# Altium PCB Matrix.PcbDoc
Units mm, origin at the board's own origin, x right, y up, seen from the top; angles counter-clockwise.
Board outline 164.08 x 99.19 mm, 4 copper layers (Top Layer, Internal Plane 1, Internal Plane 2, Bottom Layer); 54 components, 93 nets, 274 pads, 62 vias.
Unrouted connection lines stored in the file: 12.
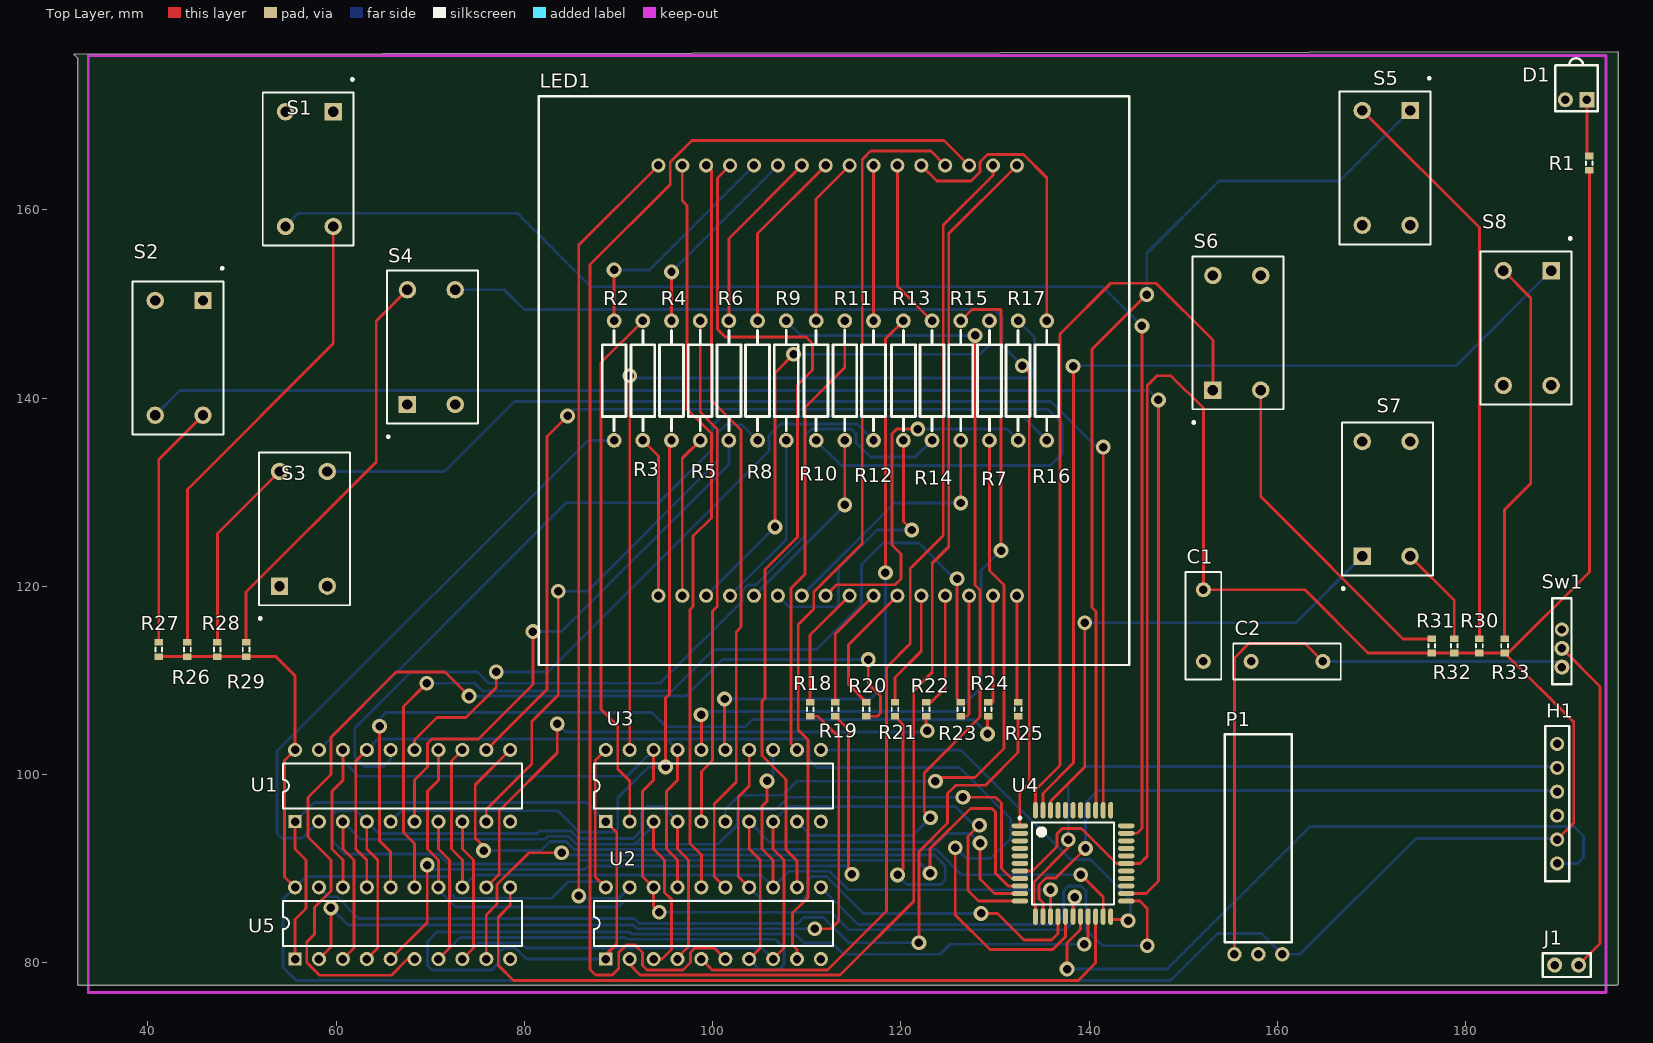
[diagram p0: Top Layer view]
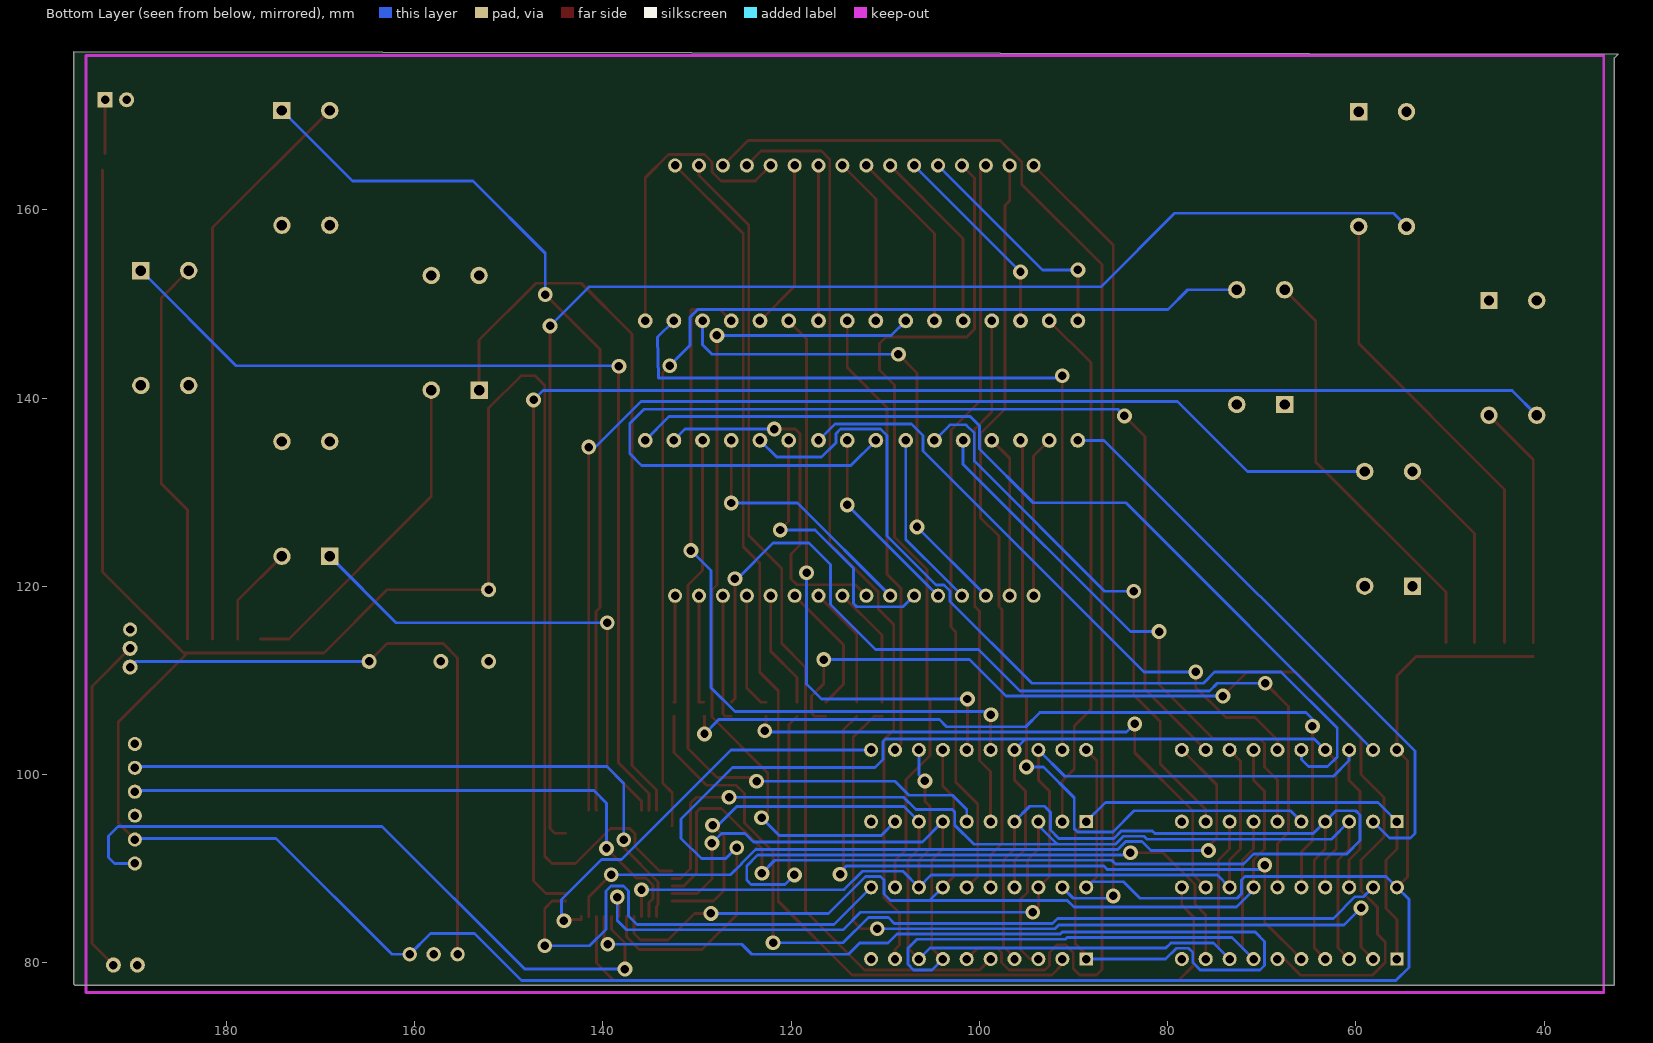
[diagram p1: Bottom Layer view, seen from below]
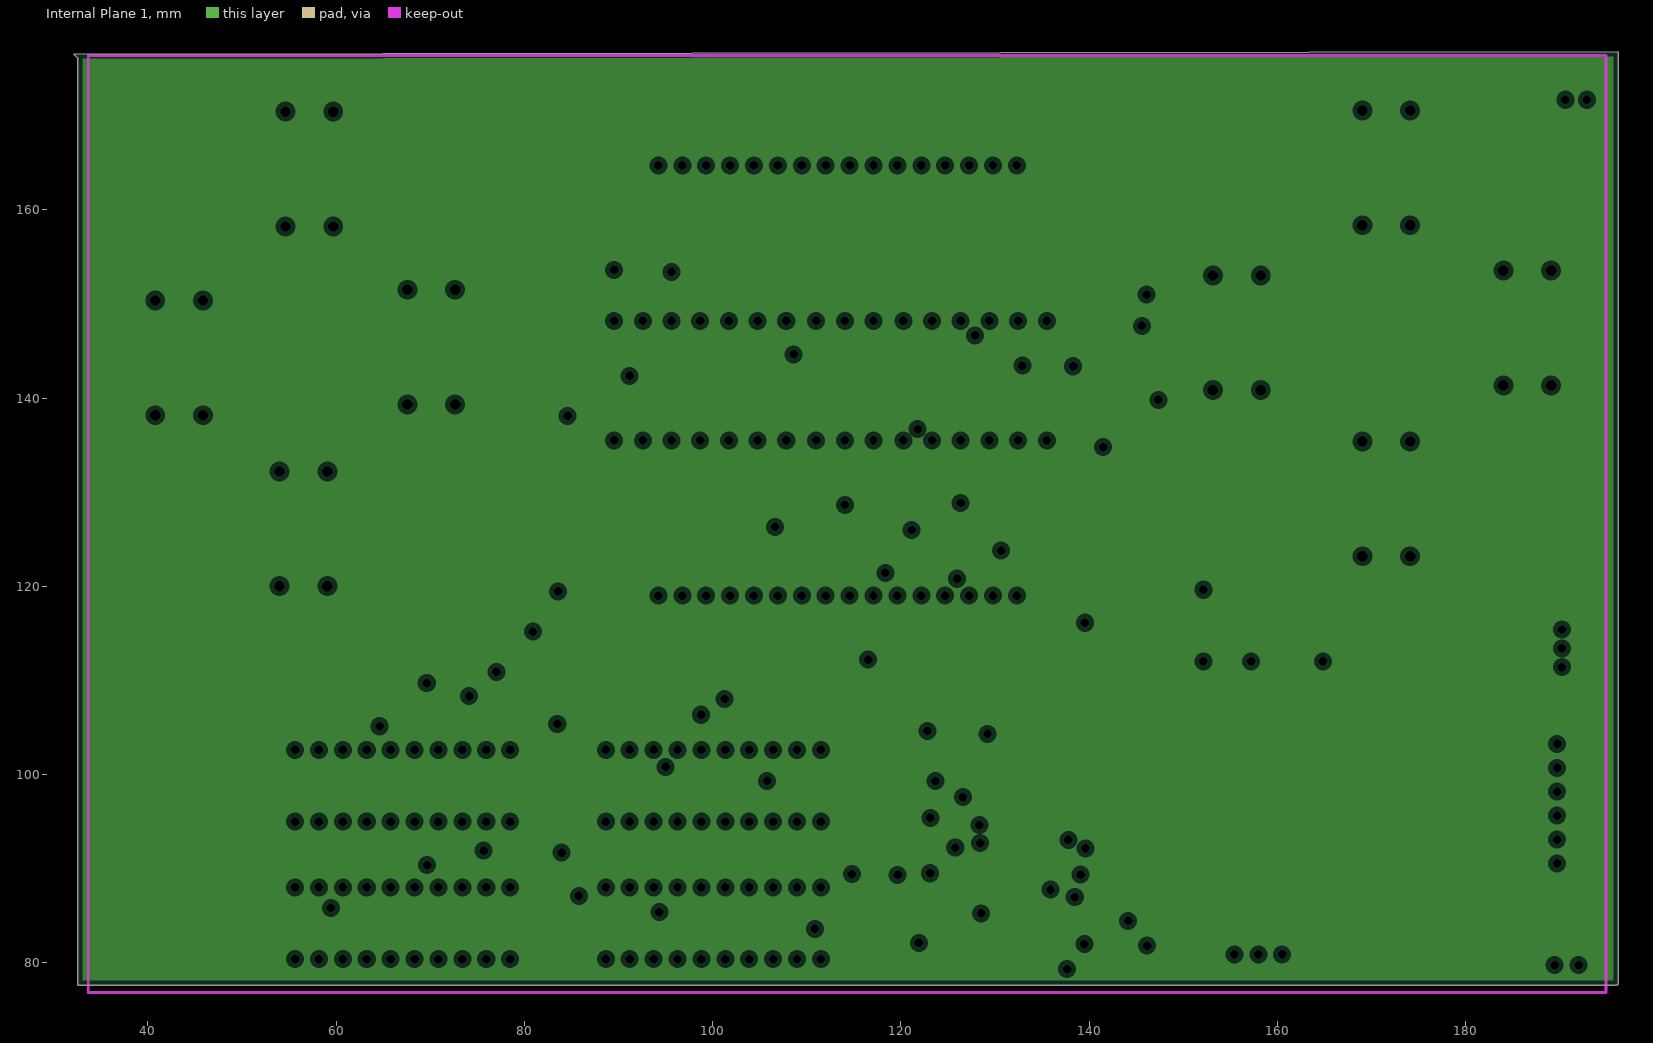
[diagram p2: Internal Plane 1, clearances drawn from the general rule]
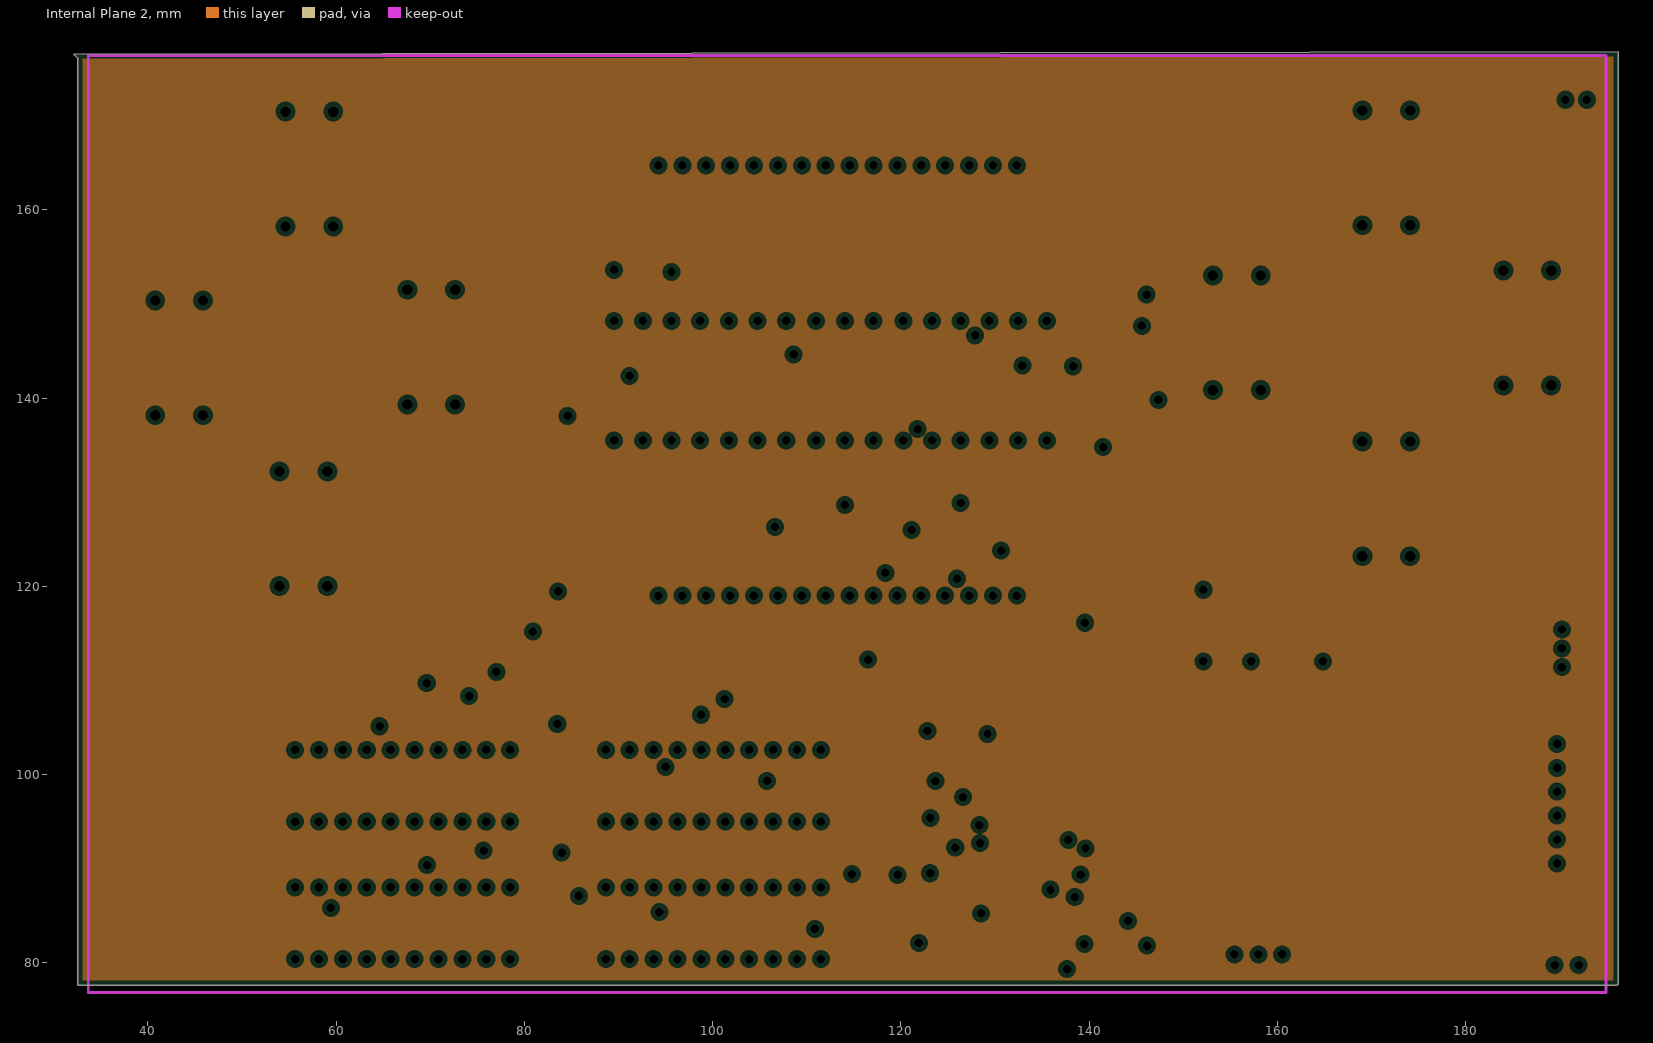
[diagram p3: Internal Plane 2, clearances drawn from the general rule]

## Layer stack, top to bottom
Top Layer: signal copper 0.0356
Dielectric: dielectric 0.32, FR-4, Dk 4.8
Internal Plane 1: plane copper 0.0356
Dielectric: dielectric 0.32, FR-4, Dk 4.8
Internal Plane 2: plane copper 0.0356
Dielectric: dielectric 0.32, FR-4, Dk 4.8
Bottom Layer: signal copper 0.0356

## Board outline
32.131,176.53 32.512,176.149 32.512,77.597 196.088,77.597 196.215,77.724 196.215,176.784

## Design rules (kind name [scope] priority, off if disabled: settings)
Clearance [All] p1: gap=0.254
PlaneClearance [All] p1: clearance=0.508
PlaneConnect [All] p1: planeconnectstyle=Relief reliefexpansion=0.508 reliefentries=4 reliefconductorwidth=0.254 reliefairgap=0.254
PolygonConnect [All] p1: connectstyle=Relief reliefconductorwidth=0.254 reliefentries=4 polygonreliefangle="90 Angle"
RoutingVias [All] p1: holewidth=0.813 width=1.575 viastyle="Through Hole" minholewidth=0.711 minwidth=1.27 maxholewidth=0.711 maxwidth=1.27
SilkscreenOverComponentPads [All] p1: minsilkscreentomaskgap=0.254
SolderMaskExpansion [All] p1: expansion=0.102
Width [All] p1: maxlimit=0.3 minlimit=0.3 preferedwidth=0.3
25 further rules are at their usual default settings.

## Components (designator, comment, footprint, x,y, rotation, side; value= is the part's Value field where it differs from the comment)
C1 "Cap" RAD-0.3 152.146,115.824 r90 top
C2 "Cap" RAD-0.3 161.036,112.014 r0 top
D1 "LED" LED-5608F 192.913,171.704 r180 top
H1 "6-pin Header" "6-pin Header" 189.738,96.901 r90 top
J1 "two-holes" two-holes 190.754,79.756 r180 top
LED1 "8x8 RGB Matrix" "8x8 RGB Matrix" 112.014,141.859 r0 top
P1 "1016-1538-5-ND" 1016-1538-5-ND 157.988,80.899 r0 top
R1 "Res25" J1-0603 193.167,164.973 r90 top
R2 "80" AXIAL0.5 89.535,148.209 r270 top
R3 "80" AXIAL0.5 92.583,148.209 r270 top
R4 "80" AXIAL0.5 95.631,148.209 r270 top
R5 "80" AXIAL0.5 98.679,148.209 r270 top
R6 "80" AXIAL0.5 101.727,148.209 r270 top
R7 "80" AXIAL0.5 129.413,135.509 r90 top
R8 "80" AXIAL0.5 104.775,148.209 r270 top
R9 "80" AXIAL0.5 107.823,148.209 r270 top
R10 "80" AXIAL0.5 110.998,148.209 r270 top
R11 "80" AXIAL0.5 114.046,148.209 r270 top
R12 "80" AXIAL0.5 117.094,148.209 r270 top
R13 "80" AXIAL0.5 120.269,148.209 r270 top
R14 "80" AXIAL0.5 123.317,148.209 r270 top
R15 "80" AXIAL0.5 126.365,148.209 r270 top
R16 "80" AXIAL0.5 135.509,148.209 r270 top
R17 "80" AXIAL0.5 132.461,148.209 r270 top
R18 "Res3" J1-0603 110.363,106.934 r90 top
R19 "Res3" J1-0603 113.03,106.934 r90 top
R20 "Res3" J1-0603 116.332,106.934 r90 top
R21 "Res3" J1-0603 119.38,106.934 r90 top
R22 "Res3" J1-0603 122.682,106.934 r90 top
R23 "Res3" J1-0603 126.365,106.934 r270 top
R24 "Res3" J1-0603 129.286,106.934 r90 top
R25 "Res3" J1-0603 132.461,106.934 r90 top
R26 "Res3" J1-0603 44.196,113.284 r270 top
R27 "Res3" J1-0603 41.148,113.284 r270 top
R28 "Res3" J1-0603 47.371,113.284 r270 top
R29 "Res3" J1-0603 50.419,113.284 r270 top
R30 "Res3" J1-0603 181.483,113.665 r270 top
R31 "Res3" J1-0603 176.403,113.665 r270 top
R32 "Res3" J1-0603 178.816,113.665 r270 top
R33 "Res3" J1-0603 184.15,113.665 r270 top
S1 "SW-DPST" DPST-4 57.15,164.338 r270 top
S2 "SW-DPST" DPST-4 43.307,144.272 r270 top
S3 "SW-DPST" DPST-4 56.515,126.111 r90 top
S4 "SW-DPST" DPST-4 70.104,145.415 r90 top
S5 "SW-DPST" DPST-4 171.577,164.465 r270 top
S6 "SW-DPST" DPST-4 155.702,146.939 r90 top
S7 "SW-DPST" DPST-4 171.577,129.286 r90 top
S8 "SW-DPST" DPST-4 186.563,147.447 r270 top
Sw1 "563-1090-ND" 563-1090-ND 190.246,113.411 r90 top
U1 "74HC373" 74HC373 55.626,94.996 r90 top
U2 "74HC373" 74HC373 88.646,80.391 r90 top
U3 "74HC373" 74HC373 88.646,94.996 r90 top
U4 "PIC18F4550-I/PT" TQFP-PT44_N 138.303,90.551 r0 top
U5 "74HC373" 74HC373 55.626,80.391 r90 top

## Footprints (in the part's own frame and the unit in brackets; to place one, negate y for a bottom-side part, rotate by r counter-clockwise, add the part's x,y. Pads: shape width x height; smd on the part's side, far side on the other; paste and mask are expansions set on the pad)
"6-pin Header" [mm]
  round 1.5 hole 0.9: 1(-6.35,0) 2(-3.81,0) 3(-1.27,0) 4(1.27,0) 5(3.81,0) 6(6.35,0)
  silkscreen extent -8.25,-1.27 8.25,1.27
"8x8 RGB Matrix" [mm]
  round 1.5 hole 0.9: 1(-17.78,-22.86) 2(-15.24,-22.86) 3(-12.7,-22.86) 4(-10.16,-22.86) 5(-7.62,-22.86) 6(-5.08,-22.86) 7(-2.54,-22.86) 8(0,-22.86) 9(2.54,-22.86) 10(5.08,-22.86) 11(7.62,-22.86) 12(10.16,-22.86) 13(12.7,-22.86) 14(15.24,-22.86) 15(17.78,-22.86) 16(20.32,-22.86) 17(20.32,22.86) 18(17.78,22.86) 19(15.24,22.86) 20(12.7,22.86) 21(10.16,22.86) 22(7.62,22.86) 23(5.08,22.86) 24(2.54,22.86) 25(0,22.86) 26(-2.54,22.86) 27(-5.08,22.86) 28(-7.62,22.86) 29(-10.16,22.86) 30(-12.7,22.86) 31(-15.24,22.86) 32(-17.78,22.86)
  silkscreen extent -30.48,-30.23 32.26,30.23
74HC373 [mm]
  rect 1.4x1.4 hole 0.9: 1(0,0)
  round 1.5 hole 0.9: 2(0,-2.54) 3(0,-5.08) 4(0,-7.62) 5(0,-10.16) 6(0,-12.7) 7(0,-15.24) 8(0,-17.78) 9(0,-20.32) 10(0,-22.86) 11(7.62,-22.86) 12(7.62,-20.32) 13(7.62,-17.78) 14(7.62,-15.24) 15(7.62,-12.7) 16(7.62,-10.16) 17(7.62,-7.62) 18(7.62,-5.08) 19(7.62,-2.54) 20(7.62,0)
  silkscreen extent 1.4,-24.13 6.19,1.27
563-1090-ND [mm]
  round 1.6 hole 0.9: 1(-2,0) 2(0,0)
  round 1.5 hole 0.9: 3(2,0)
  silkscreen extent -3.81,-1.02 5.33,1.02
1016-1538-5-ND [mil]
  round 60 hole 35.43: 0(-100,0) 1(0,0) 2(100,0)
  silkscreen extent -140,50 140,920
AXIAL0.5 [mil]
  round 62 hole 35.43: 1(0,0) 2(500,0)
  silkscreen extent 40,-50 460,50
DPST-4 [mm] "Switch; 4 Leads"
  rect 1.85x1.85 hole 1.1: 1(-6.096,2.54)
  round 1.85 hole 1.1: 2(-6.096,-2.54) 3(6.096,-2.54) 4(6.096,2.54)
  silkscreen extent -9.65,-4.95 8.13,4.7
J1-0603 [mm] "Chip Resistor, Body 1.6x0.8mm, IPC High Density"
  rect 0.7x0.9 smd: 1(-0.75,0) 2(0.75,0)
  silkscreen extent -0.2,-0.35 0.2,0.35, body extent -0.85,-0.48 0.85,0.48, height 0.9
LED-5608F [mm]
  rect 1.6x1.6 hole 0.9: A(0,0)
  round 1.6 hole 0.9: K(2.3,0)
  silkscreen extent -1.14,-4.41 3.38,1.23
RAD-0.3 [mm] "Radial Cap, Thru-Hole; 2 Leads; 0.3 in Pin Spacing"
  round 1.6 hole 0.9: 1(-3.81,0) 2(3.81,0)
  silkscreen extent -5.71,-1.91 5.71,1.91
TQFP-PT44_N [mm] "Thin QFP, 44-Leads, Body 10x10mm, Pitch 0.8mm, IPC Medium Density"
  oval 1.75x0.525 smd: 1(-5.65,4) 2(-5.65,3.2) 3(-5.65,2.4) 4(-5.65,1.6) 5(-5.65,0.8) 6(-5.65,0) 7(-5.65,-0.8) 8(-5.65,-1.6) 9(-5.65,-2.4) 10(-5.65,-3.2) 11(-5.65,-4) 23(5.65,-4) 24(5.65,-3.2) 25(5.65,-2.4) 26(5.65,-1.6) 27(5.65,-0.8) 28(5.65,0) 29(5.65,0.8) 30(5.65,1.6) 31(5.65,2.4) 32(5.65,3.2) 33(5.65,4)
  oval 0.55x1.75 smd: 12(-4,-5.65)
  oval 0.525x1.75 smd: 13(-3.2,-5.65) 14(-2.4,-5.65) 15(-1.6,-5.65) 16(-0.8,-5.65) 17(0,-5.65) 18(0.8,-5.65) 19(1.6,-5.65) 20(2.4,-5.65) 21(3.2,-5.65) 22(4,-5.65) 34(4,5.65) 35(3.2,5.65) 36(2.4,5.65) 37(1.6,5.65) 38(0.8,5.65) 39(0,5.65) 40(-0.8,5.65) 41(-1.6,5.65) 42(-2.4,5.65) 43(-3.2,5.65) 44(-4,5.65)
  silkscreen extent -5.77,-4.35 4.35,4.95, body extent -5,-5 5,5, height 1.2
two-holes [mm]
  round 1.6 hole 0.9: 1(-1.27,0) 2(1.27,0)
  silkscreen extent -2.54,-1.27 2.54,1.27

## Part data
C1 C2: "Capacitor"
D1: "Light Emitting Diode LED"
R1: library part Res3, "Resistor"
R2 R3 R4 R5 R6 R7 R8 R9 R10 R11 R12 R13 R14 R15 R16 R17: library part RES1
R18 R19 R20 R21 R22 R23 R24 R25 R26 R27 R28 R29 R30 R31 R32 R33: "Resistor"
S1 S2 S3 S4 S5 S6 S7 S8: "Double-Pole, Single-Throw Switch"
U4: "High Performance, Enhanced Flash, USB Microcontroller with nanoWatt Technology, 32K Flash, 44-Pin TQFP, Industrial Temperature Range"

## Via types
v1: diameter 1.575, hole 0.9, Top Layer to Bottom Layer, 61 vias
v2: diameter 1.575/1.575 (per signal layer), hole 0.9, Top Layer to Bottom Layer, 1 vias

## Nets (pads, with @x,y where several pads share a name; then routed paths per layer and width w, separated by ;. In a path a pad name is that pad's centre, name@x,y a point inside that pad or via, vN(x,y) a via of type N, cw(c..) or ccw(c..) an arc to the next point about the centre after c; other vN are vias at no path point)
!OE: U1.1 U2.1 U3.1 U4.19 U5.1 | length 164.4
  Top Layer w0.3: U5.1 55.626,84.579 56.794,85.747 56.794,90.907 55.626,92.075 U1.1 ; U2.1 88.646,80.852 89.814,82.021 89.814,93.828 U3.1 ; v1(139.497,81.966) 139.903,82.372 U4.19
  Bottom Layer w0.3: U1.1 57.658,97.028 86.614,97.028 U3.1 ; U2.1 80.213,80.391 79.059,81.545 77.787,81.545 77.318,81.075 77.318,80.01 76.53,79.223 70.168,79.223 69.698,79.692 69.698,82.271 70.688,83.261 91.196,83.261 91.404,83.054 108.744,83.054 109.698,82.099 112.719,82.099 113.913,80.905 124.184,80.905 125.245,81.966 v1(139.497,81.966)
BL0: R3.1 U3.2 | length 56.3
  Top Layer w0.3: U3.2 91.186,99.314 89.916,100.584 89.916,105.156 88.138,106.934 88.138,143.764 R3.1
BL1: R5.1 U3.5 | length 54.7
  Top Layer w0.3: R5.1 98.679,138.532 100.482,136.728 100.482,117.856 99.974,117.348 99.974,101.473 98.806,100.305 U3.5
BL2: R7.1 U3.6 | length 67
  Top Layer w0.3: v1(123.673,99.289) 124.079,99.695 127.889,99.695 130.962,102.768 130.962,120.142 129.413,121.691 R7.1
  Bottom Layer w0.3: U3.6 101.346,96.266 102.87,97.79 107.478,97.79 108.977,99.289 v1(123.673,99.289)
BL3: R9.1 U3.9 | length 90.5
  Top Layer w0.3: v1(123.139,95.402) 122.481,96.06 122.481,100.155 128.422,106.096 128.422,119.609 127.889,120.142 v1(127.889,146.66)
  Bottom Layer w0.3: R9.1 109.372,146.66 v1(127.889,146.66) ; U3.9 110.431,93.531 121.268,93.531 v1(123.139,95.402)
BL4: R11.1 U3.12 | length 48.2
  Top Layer w0.3: U3.12 108.32,103.262 108.32,119.801 109.804,121.285 109.804,139.014 114.046,143.256 R11.1
BL5: R13.1 U3.15 | length 62.6
  Top Layer w0.3: v1(101.27,108.026) 101.27,102.616 U3.15 ; v1(118.364,121.437) 118.364,146.304 R13.1
  Bottom Layer w0.3: v1(101.27,108.026) 116.789,108.026 118.364,109.601 v1(118.364,121.437)
BL6: R15.1 U3.16 | length 80.5
  Top Layer w0.3: v1(98.781,106.35) 98.806,106.324 U3.16 ; R15.1 127.559,149.403 130.607,149.403 130.658,149.352 v1(130.658,123.8)
  Bottom Layer w0.3: v1(98.781,106.35) 99.111,106.68 125.984,106.68 128.524,109.22 128.524,121.666 v1(130.658,123.8)
BL7: R17.1 U3.19 | length 89.5
  Top Layer w0.3: U3.19 v1(91.186,142.367)
  Bottom Layer w0.3: v1(91.186,142.367) 91.415,142.138 134.087,142.138 134.188,146.482 R17.1
BLE: U3.11 U4.22 | length 44
  Top Layer w0.3: U4.22 142.303,84.582 144.272,84.582 v2@144.399,84.709
  Bottom Layer w0.3: U3.11 126.38,102.616 138.036,90.96 140.152,90.96 144.399,86.713 v2@144.399,84.709
  other v2: 144.145,84.455
DATA0: U1.3 U2.3 U3.3 U4.8 U5.3 | length 119.3
  Top Layer w0.3: U5.3 61.874,81.559 61.874,90.907 60.706,92.075 U1.3 ; U2.3 94.615,80.391 95.631,81.407 95.631,86.741 94.894,87.478 94.894,90.907 93.726,92.075 U3.3 ; v1(126.594,97.587) 130.072,97.587 130.683,96.976 130.683,90.031 131.762,88.951 U4.8
  Bottom Layer w0.3: U1.3 62.582,93.12 82.177,93.12 82.496,93.439 84.67,93.439 85.526,92.583 91.694,92.583 ; U3.3 93.726,94.594 91.796,92.664 91.775,92.664 91.694,92.583 ; v1(126.594,97.587) 108.064,97.587 106.743,96.266 102.863,96.266 102.616,96.019 102.616,94.615 100.584,92.583 91.694,92.583
DATA1: U1.4 U2.4 U3.4 U4.9 U5.4 | length 161.9
  Top Layer w0.3: U5.4 64.414,81.559 64.414,90.907 63.246,92.075 U1.4 ; U2.4 96.266,80.573 97.434,81.741 97.434,90.907 96.266,92.075 U3.4 ; v1(123.114,89.51) 123.114,92.113 127.394,96.393 129.667,96.393 130.048,96.012 130.048,89.514 131.411,88.151 U4.9
  Bottom Layer w0.3: U3.4 94.64,96.622 93.091,96.622 92.456,95.987 92.456,94.107 91.567,93.218 85.704,93.218 84.928,93.993 81.622,93.993 81.355,93.726 64.516,93.726 U1.4 62.092,96.15 60.008,96.15 59.538,95.68 59.538,92.987 60.96,91.565 70.866,91.565 71.928,90.503 85.545,90.503 85.928,90.886 121.737,90.886 v1(123.114,89.51)
DATA2: U1.7 U2.7 U3.7 U4.10 U5.7 | length 110.3
  Top Layer w0.3: U5.7 72.034,81.559 72.034,90.907 70.866,92.075 U1.7 ; U2.7 105.054,81.559 105.054,90.907 103.886,92.075 U3.7 ; v1(128.422,92.71) 128.422,88.9 129.971,87.351 U4.10
  Bottom Layer w0.3: U5.7 73.152,82.677 90.672,82.677 90.85,82.5 106.629,82.5 107.594,81.534 107.594,79.832 106.999,79.237 105.04,79.237 U2.7 ; U3.7 106.036,92.846 124.018,92.846 124.899,93.726 127.406,93.726 v1(128.422,92.71)
DATA3: U1.8 U2.8 U3.8 U4.11 U5.8 | length 102.4
  Top Layer w0.3: U5.8 74.574,81.559 74.574,90.907 73.406,92.075 U1.8 ; U2.8 107.594,81.559 107.594,90.907 106.426,92.075 U3.8 ; v1(128.346,94.615) 127.127,93.396 127.127,87.694 128.27,86.551 U4.11
  Bottom Layer w0.3: U5.8 75.114,82.099 79.654,82.099 80.194,81.559 105.258,81.559 U2.8 ; U3.8 108.024,96.594 125.786,96.594 127.764,94.615 v1(128.346,94.615)
DATA4: U1.13 U2.13 U3.13 U4.14 U5.13 | length 99.1
  Top Layer w0.3: U5.13 73.406,90.932 72.238,92.1 72.238,101.448 U1.13 ; v1(105.791,99.314) 105.791,97.155 105.258,96.622 105.258,92.075 106.426,90.907 U2.13 ; U4.14 v1(135.903,87.764)
  Bottom Layer w0.3: U5.13 74.709,89.314 105.123,89.314 U2.13 108.134,89.719 112.414,89.719 114.369,87.764 v1(135.903,87.764) ; v1(105.791,99.314) 106.426,99.949 U3.13
DATA5: U1.14 U2.14 U3.14 U4.15 U5.14 | length 107.1
  Top Layer w0.3: U5.14 70.866,90.932 69.698,92.1 69.698,98.222 70.866,99.39 U1.14 ; U2.14 102.718,89.179 102.718,97.596 103.886,98.765 U3.14 ; v1(128.524,85.242) 130.277,85.242 133.096,82.423 136.017,82.423 136.703,83.109 U4.15
  Bottom Layer w0.3: U5.14 70.866,87.711 72.672,85.905 89.956,85.905 90.665,86.614 105.283,86.614 ; U2.14 105.283,86.614 ; v1(128.524,85.242) 116.019,85.242 112.097,89.165 110.49,89.165 110.134,88.809 110.134,87.312 109.436,86.614 105.283,86.614
DATA6: U1.17 U2.17 U3.17 U4.16 U5.17 | length 138.8
  Top Layer w0.3: U5.17 63.246,90.932 62.078,92.1 62.078,101.448 U1.17 ; U2.17 96.266,90.932 95.098,92.1 95.098,98.222 96.266,99.39 U3.17 ; v1(125.781,92.227) 125.781,85.09 129.464,81.407 136.144,81.407 137.503,82.766 U4.16
  Bottom Layer w0.3: U1.17 64.414,103.784 95.098,103.784 ; U3.17 95.098,103.784 ; v1(125.781,92.227) 126.949,91.059 129.54,91.059 131.699,93.218 131.699,95.275 126.238,100.736 111.1,100.736 110.236,101.6 110.236,103.505 109.957,103.784 95.098,103.784
DATA7: U1.18 U2.18 U3.18 U4.17 U5.18 | length 120
  Top Layer w0.3: U5.18 60.706,90.932 59.538,92.1 59.538,98.222 60.706,99.39 U1.18 ; U3.18 93.726,99.39 92.558,98.222 92.558,89.179 U2.18 93.726,85.979 v1(94.336,85.369) ; U4.17 138.303,86.792 v1(138.481,86.97)
  Bottom Layer w0.3: U1.18 60.706,101.473 62.357,99.822 90.932,99.822 U3.18 ; v1(94.336,85.369) 112.624,85.369 114.496,83.497 137.472,83.497 138.481,84.506 v1(138.481,86.97)
GN0: R2.2 U1.2 | length 63.6
  Bottom Layer w0.3: U1.2 56.413,93.243 54.204,93.243 53.721,93.726 53.721,102.489 86.741,135.509 R2.2
GN1: R4.2 U1.5 | length 70.4
  Top Layer w0.3: v1(94.996,100.813) 94.996,108.128 95.402,108.534 95.402,135.28 R4.2
  Bottom Layer w0.3: U1.5 66.94,96.15 83.555,96.15 85.813,93.892 89.574,93.892 89.916,94.234 89.916,97.536 93.193,100.813 v1(94.996,100.813)
GN2: R6.2 U1.6 | length 59
  Top Layer w0.3: U1.6 68.326,99.416 69.698,100.787 69.698,103.314 70.168,103.784 75.108,103.784 80.899,109.576 v1(80.899,115.189)
  Bottom Layer w0.3: v1(80.899,115.189) 83.947,115.189 101.727,132.969 R6.2
GN3: R8.2 U1.9 | length 58.6
  Top Layer w0.3: U1.9 75.946,96.291 80.772,101.117 80.772,105.628 83.591,108.447 v1(83.591,119.472)
  Bottom Layer w0.3: v1(83.591,119.472) 86.706,119.472 100.536,133.302 100.536,136.273 101.422,137.16 103.124,137.16 R8.2
GN4: R10.2 U1.12 | length 123.5
  Top Layer w0.3: U1.12 82.398,109.068 82.398,135.915 v1(84.582,138.1)
  Bottom Layer w0.3: v1(84.582,138.1) 85.293,138.811 135.636,138.811 137.16,137.287 137.16,134.112 135.89,132.842 113.665,132.842 R10.2
GN5: R12.2 U1.15 | length 66.4
  Top Layer w0.3: U1.15 68.326,103.674 70.697,106.045 73.809,106.045 77.013,109.249 v1(77.013,110.896)
  Bottom Layer w0.3: v1(77.013,110.896) 82.517,110.896 105.994,134.373 105.994,136.017 107.232,137.254 115.349,137.254 R12.2
GN6: R14.2 U1.16 | length 93.5
  Bottom Layer w0.3: U1.16 65.786,101.6 65.024,100.838 62.992,100.838 61.976,101.854 61.976,104.927 67.945,110.896 75.006,110.896 76.2,109.703 94.424,109.703 103.124,118.402 103.124,119.507 103.77,120.153 104.608,120.153 109.804,125.349 109.804,136.015 110.49,136.7 114.745,136.7 115.237,136.207 115.237,135.255 116.761,133.731 121.539,133.731 R14.2
GN7: R16.2 U1.19 | length 94.5
  Bottom Layer w0.3: U1.19 84.426,128.876 94.281,128.876 99.982,134.576 99.982,137.066 100.965,138.049 132.969,138.049 R16.2
GND: C1.1 C2.1 D1.K H1.3 J1.2 P1.1 U1.10 U2.10 U3.10 U4.6 U4.29 U4.30 U5.10
GNE: U1.11 U4.21 | length 84
  Top Layer w0.3: v1(75.667,91.923) 76.124,91.923 74.778,93.269 74.778,98.908 U1.11 ; v1(139.116,89.357) 141.503,86.97 U4.21
  Bottom Layer w0.3: v1(75.667,91.923) 81.763,91.923 82.725,92.885 84.44,92.885 85.297,92.029 123.673,92.029 123.719,92.075 125.268,90.526 125.268,90.505 126.416,89.357 v1(139.116,89.357)
NetC2_2: C2.2 P1.0 Sw1.1 | length 68
  Top Layer w0.3: P1.0 155.448,112.395 156.972,113.919 162.941,113.919 C2.2
  Bottom Layer w0.3: C2.2 189.643,112.014 Sw1.1
NetD1_A: D1.A R1.2 | length 5.7
  Top Layer w0.3: R1.2@192.913,165.977 D1.A
NetH1_1: H1.1 U4.18 | length 73.1
  Top Layer w0.3: v1(137.668,79.324) 137.668,82.106 139.103,83.541 U4.18
  Bottom Layer w0.3: v1(137.668,79.324) 148.311,79.324 163.474,94.488 175.26,94.488 175.271,94.477 191.527,94.477 192.532,93.472 192.532,91.186 191.897,90.551 H1.1
NetH1_4: H1.4 U4.13 | length 65.6
  Top Layer w0.3: U4.13 135.103,86.385 134.696,86.792 134.696,88.265 135.424,88.993 136.466,88.993 v1(139.624,92.151)
  Bottom Layer w0.3: v1(139.624,92.151) 139.624,96.952 140.97,98.298 189.611,98.298 H1.4
NetH1_5: H1.5 U4.12 | length 68.5
  Top Layer w0.3: U4.12 134.303,85.979 134.137,86.145 134.137,88.595 137.795,92.253 v1(137.795,93.066)
  Bottom Layer w0.3: v1(137.795,93.066) 137.795,99.06 139.573,100.838 189.611,100.838 H1.5
NetJ1_1: J1.1 Sw1.2 | length 36.3
  Top Layer w0.3: Sw1.2 194.31,109.347 194.31,82.042 J1.1
NetLED1_1: LED1.1 R3.2 | length 17.2
  Top Layer w0.3: R3.2 94.234,133.858 LED1.1
NetLED1_2: LED1.2 R5.2 | length 17.3
  Top Layer w0.3: LED1.2 96.774,133.604 R5.2
NetLED1_3: LED1.3 R7.2 | length 53.3
  Top Layer w0.3: v1(106.629,126.314) 106.629,142.672 v1(108.61,144.653)
  Bottom Layer w0.3: LED1.3 v1(106.629,126.314) ; v1(108.61,144.653) 128.397,144.653 129.413,145.669 R7.2
NetLED1_4: LED1.4 R9.2 | length 19
  Bottom Layer w0.3: LED1.4 101.854,119.02 103.541,120.707 103.562,120.707 107.823,124.968 R9.2
NetLED1_5: LED1.5 R11.2 | length 20.5
  Top Layer w0.3: v1(114.046,128.651) R11.2
  Bottom Layer w0.3: LED1.5 v1(114.046,128.651)
NetLED1_6: LED1.6 R13.2 | length 30.2
  Top Layer w0.3: R13.2 120.269,126.873 v1(121.158,125.984)
  Bottom Layer w0.3: LED1.6 108.102,117.831 113.03,117.831 113.386,118.186 113.386,121.92 117.45,125.984 v1(121.158,125.984)
NetLED1_7: LED1.7 R15.2 | length 27.6
  Top Layer w0.3: v1(126.365,128.854) R15.2
  Bottom Layer w0.3: LED1.7 119.329,128.854 v1(126.365,128.854)
NetLED1_8: LED1.8 R17.2 | length 38.6
  Top Layer w0.3: LED1.8 113.182,120.167 119.398,120.167 120.015,120.784 120.015,123.444 119.075,124.384 119.075,136.207 119.57,136.703 v1(121.793,136.703)
  Bottom Layer w0.3: v1(121.793,136.703) 131.267,136.703 R17.2
NetLED1_9: LED1.9 R18.2 | length 13.1
  Top Layer w0.3: R18.2 110.363,114.808 LED1.9
NetLED1_10: LED1.10 R19.2 | length 13
  Top Layer w0.3: R19.2 113.03,114.935 LED1.10
NetLED1_11: LED1.11 R20.2 | length 14.3
  Top Layer w0.3: R20.2 114.427,109.589 114.427,113.792 LED1.11
NetLED1_12: LED1.12 R21.2 | length 12.5
  Top Layer w0.3: R21.2 119.38,110.301 122.174,113.095 LED1.12
NetLED1_13: LED1.13 R22.2 | length 12.5
  Top Layer w0.3: R22.2 123.19,107.684 124.714,109.208 LED1.13
NetLED1_14: LED1.14 R23.2 | length 13.6
  Top Layer w0.3: R23.2 127.012,106.184 127.254,106.426 LED1.14
NetLED1_15: LED1.15 R24.2 | length 11.8
  Top Layer w0.3: R24.2 129.794,107.684 LED1.15
NetLED1_16: LED1.16 R25.2 | length 11.4
  Top Layer w0.3: LED1.16 132.334,107.684 R25.2
NetLED1_21: LED1.21 R16.1 | length 32
  Top Layer w0.3: LED1.21 123.825,163.068 127.47,163.068 128.422,164.02 128.422,165.1 129.21,165.887 133.032,165.887 135.509,163.411 R16.1
NetLED1_22: LED1.22 R14.1 | length 18
  Top Layer w0.3: LED1.22 119.634,151.892 R14.1
NetLED1_23: LED1.23 R12.1 | length 16.5
  Top Layer w0.3: R12.1 LED1.23
NetLED1_24: LED1.24 R10.1 | length 18
  Top Layer w0.3: R10.1 110.998,161.163 LED1.24
NetLED1_25: LED1.25 R8.1 | length 19.5
  Top Layer w0.3: R8.1 104.775,157.48 LED1.25
NetLED1_26: LED1.26 R6.1 | length 19.7
  Top Layer w0.3: R6.1 101.727,156.972 LED1.26
NetLED1_27: LED1.27 R4.1 | length 21.2
  Top Layer w0.3: R4.1 v1(95.631,153.416)
  Bottom Layer w0.3: v1(95.631,153.416) LED1.27
NetLED1_28: LED1.28 R2.1 | length 24.9
  Top Layer w0.3: R2.1 v1(89.535,153.619)
  Bottom Layer w0.3: v1(89.535,153.619) 93.294,153.619 LED1.28
NetR26_1: R26.1 S1.4 | length 50.6
  Top Layer w0.3: R26.1 44.196,130.302 59.69,145.796 S1.4
NetR27_1: R27.1 S2.4 | length 26.1
  Top Layer w0.3: R27.1 41.148,133.477 S2.4
NetR28_1: R28.1 S3.4 | length 20.9
  Top Layer w0.3: R28.1 47.371,125.603 S3.4
NetR29_1: R29.1 S4.4 | length 44.6
  Top Layer w0.3: R29.1 50.419,119.38 64.262,133.223 64.262,148.209 S4.4
NetR30_1: R30.1 S5.2 | length 61.3
  Top Layer w0.3: S5.2 181.483,158.115 R30.1
NetR31_1: R31.1 S6.2 | length 35.7
  Top Layer w0.3: S6.2 158.242,129.54 173.367,114.415 R31.1
NetR32_1: R32.1 S7.2 | length 10.7
  Top Layer w0.3: S7.2 178.816,118.491 R32.1
NetR33_1: R33.1 S8.2 | length 41.5
  Top Layer w0.3: S8.2 186.944,150.622 186.944,130.937 184.15,128.143 R33.1
RD0: R18.1 U5.2 | length 84.7
  Top Layer w0.3: U5.2 59.436,81.661 v1(59.436,85.827) ; R18.1 111.189,106.184 113.411,103.962 113.411,84.455 112.564,83.608 v1(110.862,83.608)
  Bottom Layer w0.3: v1(59.436,85.827) 61.265,83.998 91.567,83.998 91.958,83.608 v1(110.862,83.608)
RD1: R19.1 U5.5 | length 75
  Top Layer w0.3: U5.5 69.672,84.277 v1(69.672,90.373) ; R19.1@113.03,106.172 114.427,104.775 114.427,89.992 114.808,89.611 v1(114.808,89.408)
  Bottom Layer w0.3: v1(69.672,90.373) 70.129,89.916 86.405,89.916 86.762,90.273 114.146,90.273 114.808,89.611 v1(114.808,89.408)
RD2: R20.1 U5.6 | length 110.3
  Top Layer w0.3: U5.6 67.589,80.391 65.862,78.664 58.217,78.664 56.871,80.01 56.871,82.194 57.709,83.033 57.709,85.903 59.436,87.63 59.436,90.932 56.998,93.37 56.998,97.561 59.436,100 59.436,103.962 66.37,110.896 71.552,110.896 v1(74.117,108.331) ; R20.1 117.487,106.184 117.856,106.553 117.856,108.331 116.535,109.652 v1(116.535,112.217)
  Bottom Layer w0.3: v1(74.117,108.331) 97.155,108.331 101.041,112.217 v1(116.535,112.217)
RD3: R21.1 U5.9 | length 82.6
  Top Layer w0.3: U5.9 75.946,85.09 77.1,86.244 77.1,88.301 80.493,91.694 v1(83.947,91.694) ; R21.1@119.38,106.172 120.244,105.308 120.244,89.916 v1(119.659,89.332)
  Bottom Layer w0.3: v1(83.947,91.694) 84.201,91.44 123.571,91.44 124.714,90.297 124.714,88.773 124.259,88.318 120.673,88.318 v1(119.659,89.332)
RD4: R22.1 U5.12 | length 62.7
  Top Layer w0.3: U5.12 77.318,89.383 77.318,96.139 83.49,102.311 v1(83.49,105.385) ; v1@122.682,104.775 R22.1 ; v1(122.809,104.648) v1@123.063,104.648
  Bottom Layer w0.3: v1(83.49,105.385) 84.353,104.521 123.19,104.521 123.063,104.648 v1(122.809,104.648)
RD5: R23.1 U5.15 | length 103.7
  Top Layer w0.3: U5.15 68.326,92.685 67.158,93.853 67.158,107.239 v1(69.621,109.703) ; v1(125.984,120.802) 125.984,108.065 R23.1
  Bottom Layer w0.3: v1(69.621,109.703) 74.722,109.703 75.534,108.891 95.683,108.891 100.076,113.284 111.049,113.284 115.824,118.059 115.824,122.301 118.11,124.587 121.92,124.587 125.705,120.802 v1(125.984,120.802)
RD6: R24.1 U5.16 | length 86.8
  Top Layer w0.3: v1(64.618,105.131) 64.618,92.964 65.786,91.796 U5.16 ; v1(129.21,104.318) 129.21,106.184 R24.1
  Bottom Layer w0.3: v1(64.618,105.131) 64.618,105.907 65.287,106.576 93.576,106.576 95.072,105.08 103.48,105.08 104.239,105.839 127.688,105.839 v1(129.21,104.318)
RD7: R25.1 U5.19 | length 97
  Top Layer w0.3: v1(121.922,82.118) 121.922,91.798 124.968,94.844 124.968,97.968 125.857,98.857 128.981,98.857 132.461,102.337 R25.1
  Bottom Layer w0.3: U5.19 59.157,87.02 60.071,87.02 62.382,84.709 91.694,84.709 92.227,84.176 109.045,84.176 109.668,84.799 111.797,84.799 114.478,82.118 v1(121.922,82.118)
RDE: U4.20 U5.11 | length 78.7
  Top Layer w0.3: U5.11 78.486,86.106 77.216,84.836 77.216,79.731 78.842,78.105 138.854,78.105 140.703,79.954 U4.20
ROW0: LED1.17 U2.2 | length 117.2
  Top Layer w0.3: U2.2 91.186,79.798 92.301,78.683 113.521,78.683 121.368,86.53 121.368,108.897 123.342,110.871 123.342,122.453 125.095,124.206 125.095,157.48 LED1.17
ROW1: LED1.18 U2.5 | length 106.7
  Top Layer w0.3: U2.5 99.96,79.237 112.219,79.237 118.468,85.486 118.468,111.384 121.006,113.921 121.006,121.895 124.511,125.4 124.511,158.377 129.794,163.661 LED1.18
ROW2: LED1.19 U2.6 | length 144.1
  Top Layer w0.3: U2.6 100.178,81.559 98.108,81.559 97.652,81.104 97.652,80.024 96.865,79.237 93.013,79.237 92.558,79.692 92.558,81.077 91.719,81.915 90.843,81.915 90.018,81.09 90.018,79.375 89.332,78.689 87.554,78.689 86.97,79.273 86.97,154.178 95.504,162.712 95.504,165.1 97.79,167.386 124.587,167.386 LED1.19
ROW3: LED1.20 U2.9 | length 98.9
  Top Layer w0.3: U2.9 108.966,81.396 108.491,81.871 108.491,85.268 110.134,86.912 110.134,103.697 109.093,104.738 109.093,115.951 110.744,117.602 110.744,119.38 115.9,124.536 115.9,165.354 116.789,166.243 123.19,166.243 LED1.20
ROW4: LED1.29 U2.12 | length 90.2
  Top Layer w0.3: LED1.29 100.533,163.398 100.533,147.32 101.346,146.507 109.906,146.507 110.617,145.796 110.617,143.002 109.017,141.402 109.017,125.222 105.562,121.768 105.562,108.102 105.258,107.798 105.258,102.006 107.798,99.466 107.798,91.999 108.966,90.83 U2.12
ROW5: LED1.30 U2.15 | length 79.9
  Top Layer w0.3: LED1.30 99.873,164.16 99.873,139.751 103.022,136.601 103.022,115.672 102.514,115.164 102.514,99.212 100.178,96.876 100.178,89.179 U2.15
ROW6: LED1.31 U2.16 | length 79.4
  Top Layer w0.3: LED1.31 96.774,160.985 97.282,160.477 97.282,138.836 99.87,136.248 99.87,127.272 97.928,125.33 97.928,117.856 97.587,117.515 97.587,92.685 98.806,91.465 U2.16
ROW7: LED1.32 U2.19 | length 87.1
  Top Layer w0.3: v1(85.776,87.097) 85.776,156.261 LED1.32
  Bottom Layer w0.3: v1(85.776,87.097) 86.015,86.857 90.032,86.857 U2.19
ROWE: U2.11 U4.23 | length 51.1
  Top Layer w0.3: U4.23 145.415,86.551 146.177,85.789 v1(146.177,81.813)
  Bottom Layer w0.3: U2.11 115.466,84.051 136.375,84.051 137.289,84.965 137.289,87.63 137.825,88.166 139.139,88.166 139.675,87.63 139.675,83.541 141.402,81.813 v1(146.177,81.813)
SW1: S1.3 U4.32 | length 151.8
  Top Layer w0.3: U4.32 145.097,93.751 145.625,94.279 v1(145.625,147.667)
  Bottom Layer w0.3: S1.3 56.007,159.639 79.248,159.639 87.063,151.824 141.469,151.824 v1(145.625,147.667)
SW2: S3.3 U4.35 | length 126.1
  Top Layer w0.3: U4.35 v1(141.503,134.798)
  Bottom Layer w0.3: S3.3 71.501,132.207 78.931,139.637 135.953,139.637 140.792,134.798 v1(141.503,134.798)
SW3: S5.1 U4.36 | length 96.1
  Top Layer w0.3: U4.36 140.739,96.237 140.739,117.32 140.31,117.75 140.31,145.186 v1(146.126,151.003)
  Bottom Layer w0.3: v1(146.126,151.003) 146.126,155.397 153.797,163.068 166.624,163.068 S5.1
SW4: S7.1 U4.42 | length 53.9
  Top Layer w0.3: U4.42 135.903,97.155 139.548,100.8 v1(139.548,116.129)
  Bottom Layer w0.3: v1(139.548,116.129) 161.976,116.129 S7.1
SW5: S8.1 U4.43 | length 103.6
  Top Layer w0.3: U4.43 135.103,97.993 138.354,101.244 138.354,143.332 v1(138.303,143.383)
  Bottom Layer w0.3: v1(138.303,143.383) 138.354,143.434 178.994,143.434 S8.1
SW6: S6.1 U4.44 | length 78
  Top Layer w0.3: U4.44 134.303,98.362 136.906,100.965 136.906,146.812 142.3,152.206 147.133,152.206 153.162,146.177 S6.1
SW7: S4.3 U4.1 | length 115
  Top Layer w0.3: U4.1 132.639,94.551 132.639,98.069 133.655,99.085 133.655,142.697 v1(132.911,143.441)
  Bottom Layer w0.3: S4.3 77.851,151.511 79.959,149.403 129.921,149.403 130.734,148.59 130.734,145.618 v1(132.911,143.441)
SW8: S2.3 U4.24 | length 163.2
  Top Layer w0.3: U4.24 146.05,87.351 147.371,88.672 v1(147.371,139.802)
  Bottom Layer w0.3: S2.3 43.383,140.792 146.38,140.792 v1(147.371,139.802)
VCC: C1.2 H1.2 P1.2 R1.1 R26.2 R27.2 R28.2 R29.2 R30.2 R31.2 R32.2 R33.2 U1.20 U2.20 U3.20 U4.7 U4.28 U5.20 | length 452.6
  Top Layer w0.3: R27.2 R26.2 R28.2 R29.2 53.582,112.534 55.626,110.49 U1.20 54.508,101.498 54.508,89.129 U5.20 ; U2.20 87.528,89.129 87.528,101.498 U3.20 ; U4.7 134.004,89.751 136.604,92.35 136.604,93.704 137.16,94.26 139.214,94.26 142.923,90.551 U4.28 145.415,90.551 146.179,91.315 146.179,141.353 147.193,142.367 148.717,142.367 152.146,138.938 C1.2 162.941,119.634 169.66,112.915 R31.2 R32.2 R30.2 R33.2 ; H1.2 191.516,94.869 191.516,105.549 R33.2 ; R1.1 193.167,121.539 184.543,112.915 R33.2
  Bottom Layer w0.3: U2.20 88.046,88.611 84.673,88.611 82.919,86.857 72.604,86.857 72.136,87.325 72.136,88.798 71.755,89.179 56.794,89.179 U5.20 54.356,86.741 54.356,79.502 55.753,78.105 148.641,78.105 153.645,83.109 158.318,83.109 P1.2 162.433,80.899 174.752,93.218 189.611,93.218 H1.2
pads on no net: H1.6 S1.1 S1.2 S2.1 S2.2 S3.1 S3.2 S4.1 S4.2 S5.3 S5.4 S6.3 S6.4 S7.3 S7.4 S8.3 S8.4 Sw1.3 U4.2 U4.3 U4.4 U4.5 U4.25 U4.26 U4.27 U4.31 U4.33 U4.34 U4.37 U4.38 U4.39 U4.40 U4.41

## Polygon pours and split planes (outlines as drawn)
no net on Internal Plane 1 (split plane): 195.705,78.107 77.472,78.107 77.472,167.481 195.705,167.481
no net on Internal Plane 1 (split plane): 195.705,168.501 76.962,168.501 76.862,168.492 76.767,168.463 76.678,168.415 76.601,168.352 76.538,168.275 76.49,168.186 76.461,168.091 76.452,167.991 76.452,78.107 33.022,78.107 33.022,176.021 195.705,176.273
no net on Internal Plane 2 (split plane): 195.705,78.107 77.472,78.107 77.472,167.481 195.705,167.481
no net on Internal Plane 2 (split plane): 195.705,168.501 76.962,168.501 76.862,168.492 76.767,168.463 76.678,168.415 76.601,168.352 76.538,168.275 76.49,168.186 76.461,168.091 76.452,167.991 76.452,78.107 33.022,78.107 33.022,176.021 195.705,176.273

## Keep-outs
Keep-Out Layer:
  lines w0.3: 33.655,76.835 33.655,176.403 194.945,176.403 194.945,76.835 33.655,76.835

## Silkscreen, mask and mechanical layers (free items; w line width, h text height)
Drill Drawing:
  text ".LEGEND" at 182.88,81.28 h1.52
  text "Drill Drawing." at 182.88,78.74 h1.52

## Dimensions
33.655,76.835 to 33.655,176.403 on Mechanical 1
33.655,76.835 to 194.945,76.835 on Mechanical 1